# Altium PCB GY-G11.PCBDOC (part 7 of 7)
Units mm, origin at the board's own origin, x right, y up, seen from the top; angles counter-clockwise.
Board outline 170.4 x 114.15 mm, 2 copper layers (Top Layer, Bottom Layer); 364 components, 260 nets, 1285 pads, 753 vias.
Unrouted connection lines stored in the file: 2.
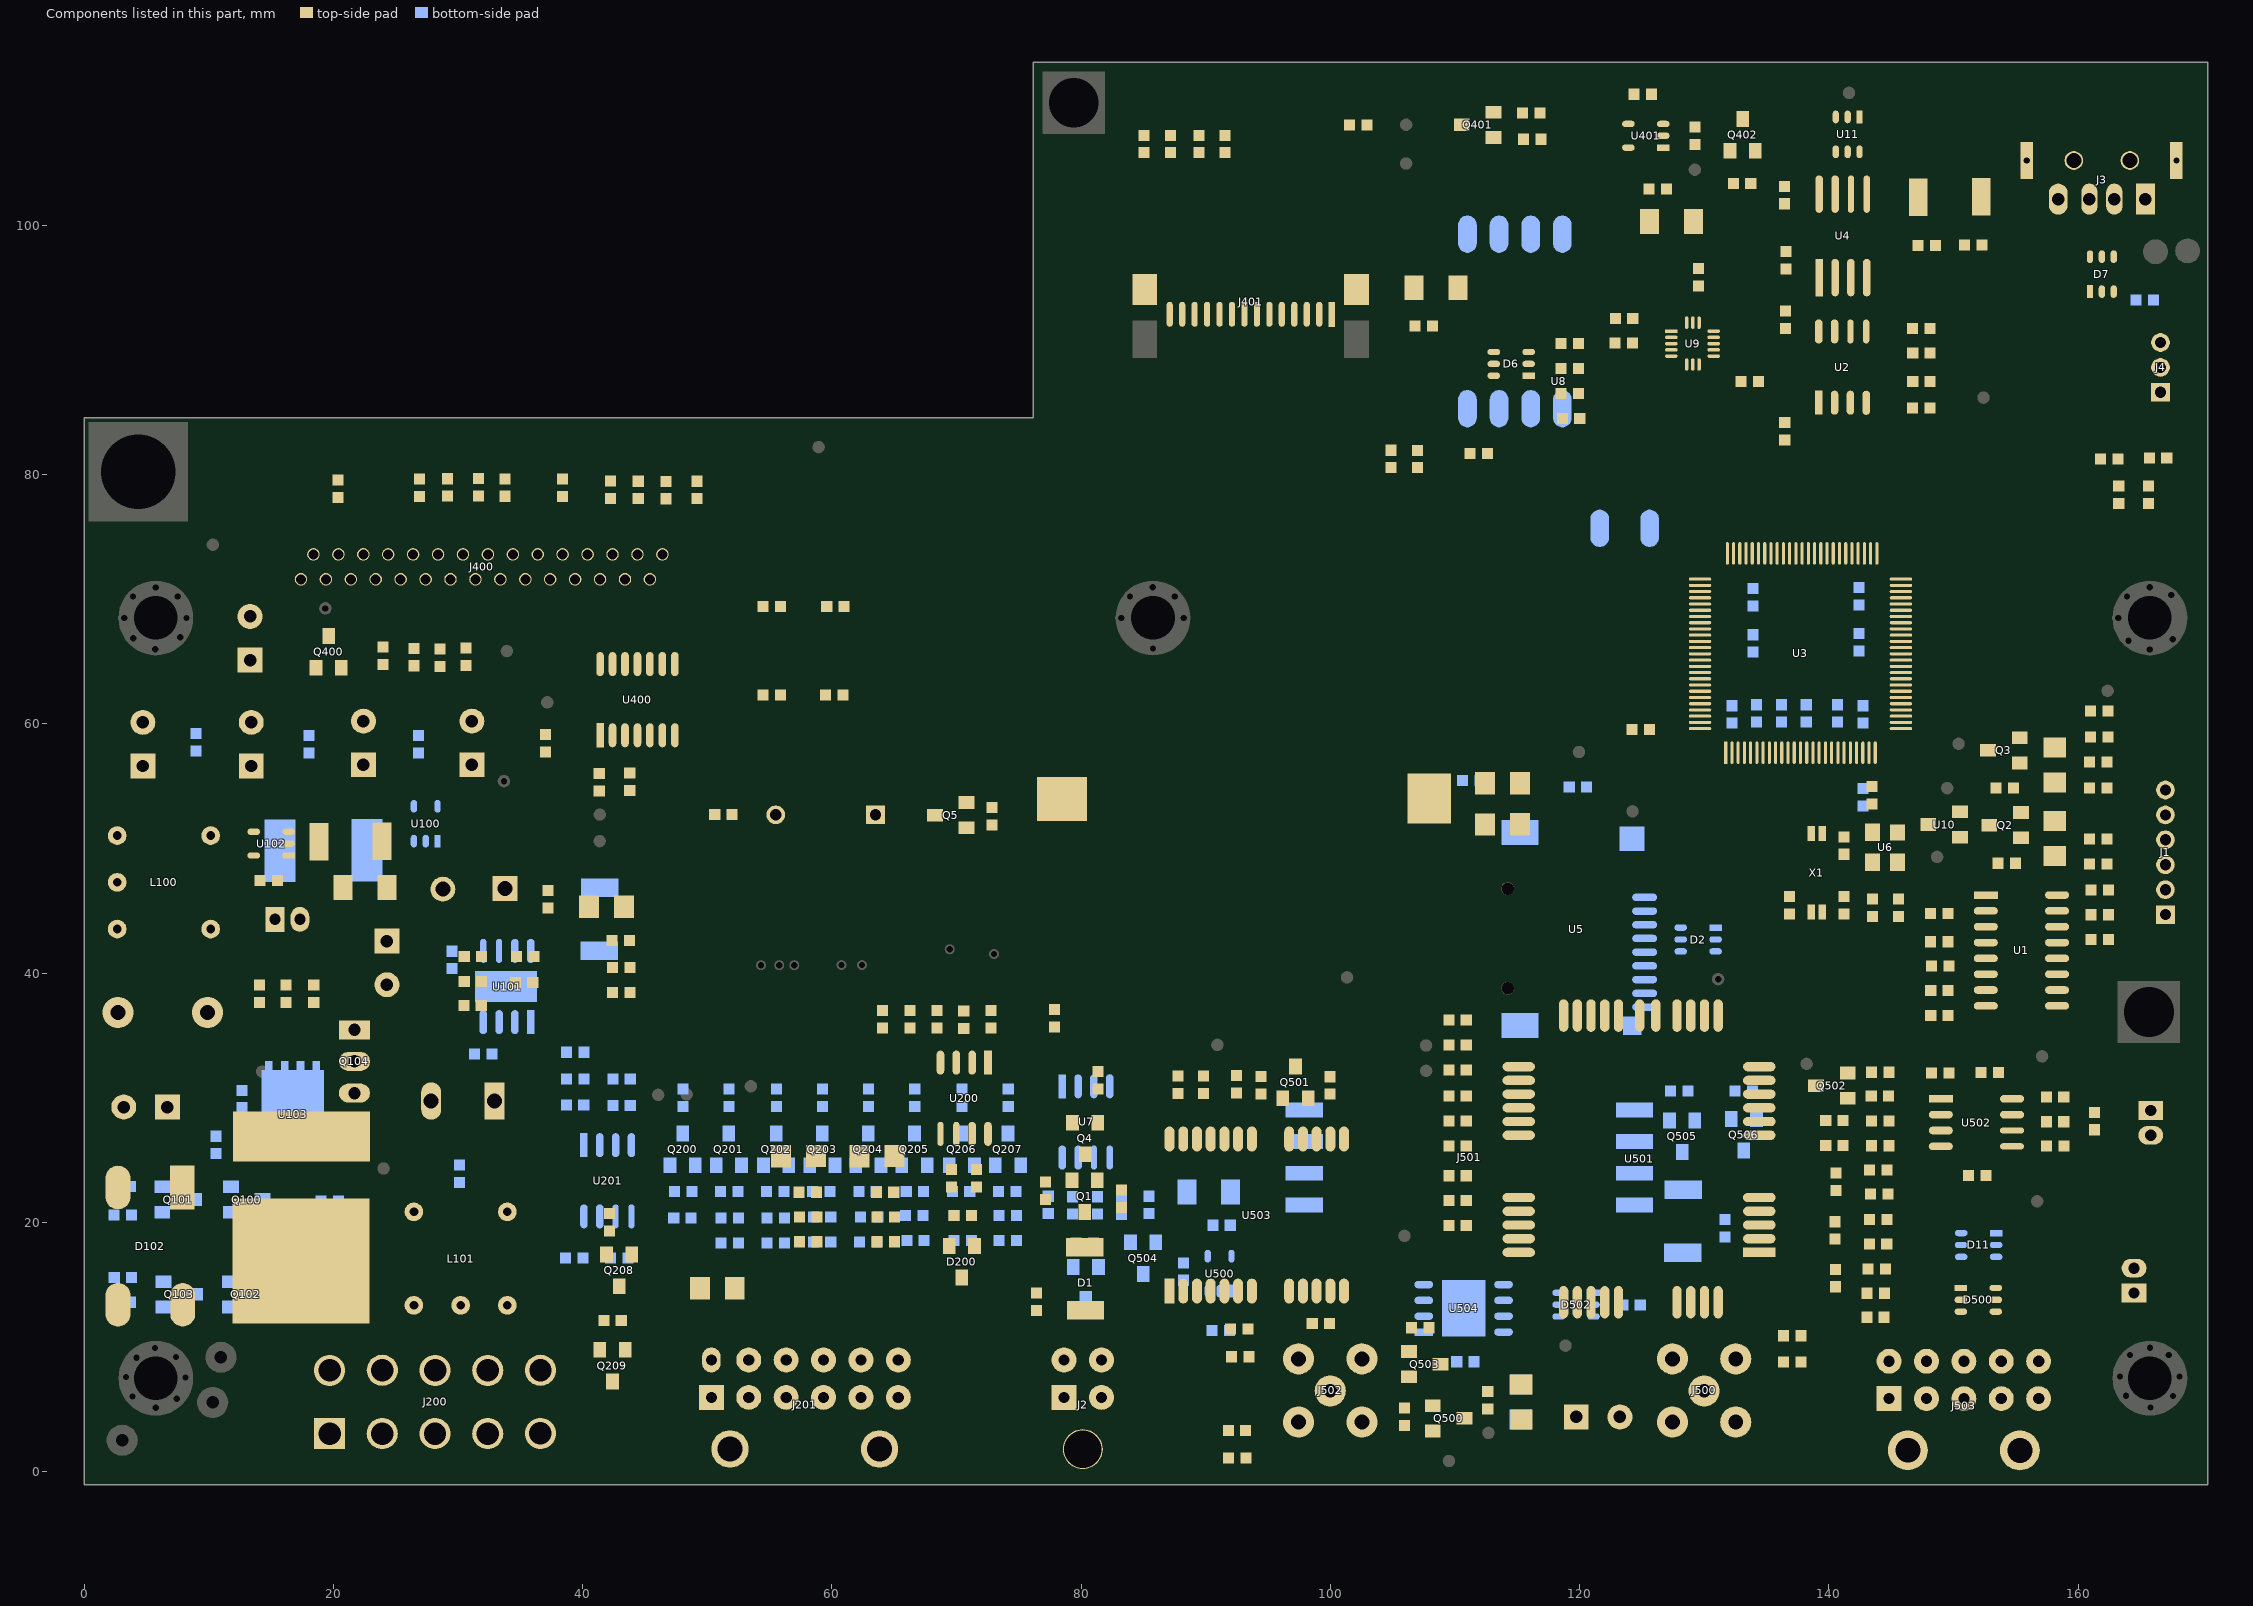
[diagram p7: the components of this part, seen from the top]

## Other copper
Top Layer:
  rectangle net AGND: 41.25,2.81 44.78,4.42
  rectangle net AGND: 40.79,1.25 42.69,2.1
  rectangle net 3V_BL: 103.111,107.68 106.2,108.49
  rectangle net 3V3: 29.81,54.88 34.35,57.9
  rectangle net GND: 128.12,89.56 130.04,91.46
  rectangle net 3V3LCM: 123.08,104.61 124.73,106.48
  rectangle net GND: 61.399,48.9 98.39,50.11
  rectangle net GND: 78.429,110.86 111.209,111.73
  rectangle net VINC: 35.15,33.88 38.069,35.05
  rectangle net 5VB: 75.8,37.65 76.32,38.87
  rectangle net 5VB: 76.16,26.01 76.8,26.3
  rectangle net 5VB: 3.18,55.41 15.12,58.16
  rectangle net 3V3: 127.89,56.728 130.62,59.11
  rectangle net 4V: 126.2,104.7 129.7,106.24
  rectangle net GND: 132.07,60.03 143.16,71.05
  rectangle net 4V: 104.62,0.3 109.38,4.11
  rectangle net VCCGSM: 110.16,2.61 119.94,5.17
  rectangle net VCCGSM: 118.34,2.59 121.31,11.43
  rectangle net 5VA: 13.66,38.97 18.89,40.7
  rectangle net 4V: 23.57,48.38 27.31,50.2
  rectangle net NetJ502_2: 92.94,0.64 103.84,3.8
  rectangle net 5VA: 24.9,44.03 26.46,46.51
  rectangle net 5VA: 24.1,43.18 25.19,46.19
  rectangle net 5VB: 65.34,38.3 67.88,42.46
  rectangle net 5VB: 62.54,80.32 68.79,83.51
  rectangle net 5VB: 66.05,37.36 66.48,38.37
  rectangle net 5VB: 9.37,50.25 13.99,52.05
  rectangle net GND: 1.28,49.94 5.85,54.21
  rectangle net 5VA: 27.43,46.84 29.77,47.87
  rectangle net GND: 77.229,83.039 79.3,111.9
  rectangle net VINC: 37.849,21.38 40.219,35.11
  rectangle net 5VP: 18.669,67.54 20.079,72.29
  rectangle net VINC: 18.039,31.77 38.029,34.13
  rectangle net NetC120_1: 1.209,33.74 4.539,37.73
  rectangle net 3V3-RTC: 115.194,52.71 116.009,52.97
  rectangle net 3V_BL: 106.2,107.68 108.13,108.47
  rectangle net 5VB: 40.14,57.178 40.8,58.368
  rectangle net 5VB: 40.8,56.738 41.63,58.368
  rectangle net GND: 95.67,109.578 96.37,111.288
  rectangle net 4V: 47.76,0.2 58.19,3.5
  rectangle net OUTCTRL: 41.97,4.83 44.62,7.87
  rectangle net AGND: 40.19,10.02 41.375,11.6
  rectangle net GND: 148.49,96.51 151.04,98.76
  rectangle net DST6: 124.809,61.43 125.399,62.07
  rectangle net 3V3-RTC: 114.9,52.56 115.65,54.86
  rectangle net GND: 98.17,59.22 123.22,61.3
  rectangle net NetC502_1: 97.67,11.492 98.04,12.86
Bottom Layer:
  rectangle net OUTCTRL: 41.98,4.86 44.68,7.88
  rectangle net AGND: 46.35,3.6 70.02,4.61
  rectangle net 5VB: 86.2,81.208 87.7,82.338
  rectangle net GND: 2.43,53.99 3.27,60.13
  rectangle net AGND: 0.839,39.39 5.76,50.65
  rectangle net VINC: 33.08,31.81 35.439,34.46
  rectangle net 3V3: 143.76,58.69 143.99,59.15
  rectangle net 3V3: 29.81,54.84 34.35,57.89
  rectangle net 4V: 94.94,53.04 95.729,53.76
  rectangle net 5VB: 8.24,48.62 11.3,56.626
  rectangle net AGND: 32.94,12.35 34.95,14.19
  rectangle net 3V3: 130.22,57.94 145.59,58.84
  rectangle net 3V3: 128.68,57.05 130.58,59.13
  rectangle net 5VB: 9.19,48.62 16.36,52.69
  rectangle net 4V: 49.69,0.14 75.46,3.36
  rectangle net 4V: 75.04,0.16 85.83,4.48
  rectangle net 4V: 85.6,0.19 109.41,2.47
  rectangle net AGND: 36.23,37.71 42.63,40.16
  rectangle net AGND: 12.09,37.54 31.54,40.18
  rectangle net 4V: 23.77,48.7 25.88,50.55
  rectangle net 4V: 26.55,48.72 28.21,49.6
  rectangle net GND: 24.5,51.35 29.24,52.5
  rectangle net GND: 24.52,52.29 25.26,59.35
  rectangle net 5VB: 65.3,38.29 67.91,42.51
  rectangle net 5VB: 62.51,80.28 68.77,83.54
  rectangle net 4V: 91.86,13.78 93.85,15.19
  rectangle net AGND: 46.4,4.38 54.579,6.94
  rectangle net AGND: 61.35,4.19 63.32,7.1
  rectangle net GND: 134.92,61.37 141.36,70.44
  rectangle net NetC100_2: 33.13,45.35 35.84,48.15
  rectangle net VINC: 35.439,31.81 37.509,37.01
  rectangle net VIN1: 31.839,19.85 34.869,31.25
  rectangle net VIN1: 15.819,24.84 32.899,27.31
  rectangle net GND: 1.159,49.99 5.809,54.19
  rectangle net VINC: 14.249,31.72 25.429,34.13
  rectangle net VIN1: 20.329,27.16 23.079,31.22
  rectangle net NetC100_2: 37.059,46.19 40.519,47.61
  rectangle net AGND: 39.829,39.894 42.406,41.33
  rectangle net GND: 17.089,45.02 17.829,45.863
  rectangle net AGND: 40.78,1.2 48.93,4.24
  rectangle net 5VB: 108.99,38.79 113.03,40.76
  rectangle net 3V3: 143.76,58.69 144.56,72.49
  rectangle net SIMCLK: 120.69,15.56 121.87,16.14
  rectangle net SCLI: 116.56,86.09 117.1,86.52

## Silkscreen, mask and mechanical layers (free items; w line width, h text height)
Top Overlay:
  circle w0.2: c41.37,52.73 r0.6
  circle w0.2: c41.364,50.596 r0.6
  circle w0.2: c11,8.91 r0.6
  circle w0.2: c14.283,32.11 r0.6
  circle w0.2: c46.06,30.24 r0.6
  circle w0.2: c48.34,30.28 r0.6
  circle w0.2: c101.33,39.67 r0.6
  circle w0.2: c112.68,3.12 r0.6
  circle w0.2: c157.1,33.33 r0.6
  circle w0.2: c119.94,57.75 r0.6
  circle w0.2: c106.07,104.97 r0.6
  circle w0.2: c106.07,108.08 r0.6
  circle w0.2: c129.24,104.47 r0.6
  circle w0.2: c141.61,110.64 r0.6
  circle w0.2: c148.679,49.33 r0.6
  circle w0.2: c149.49,54.854 r0.6
  circle w0.2: c150.4,58.41 r0.6
  circle w0.2: c37.158,61.732 r0.6
  circle w0.2: c58.93,82.21 r0.6
  circle w0.2: c124.24,52.99 r0.6
  circle w0.2: c109.51,0.86 r0.6
  circle w0.2: c19.35,69.27 r0.6
  circle w0.2: c33.91,65.85 r0.6
  circle w0.2: c90.93,34.25 r0.6
  circle w0.2: c107.67,34.2 r0.6
  circle w0.2: c107.68,32.17 r0.6
  circle w0.2: c118.86,10.11 r0.6
  circle w0.2: c152.4,86.18 r0.6
  rectangle: 168.26,43.972 168.72,45.722
  rectangle: 168.27,54.002 168.78,55.522
  rectangle: 112.26,101.13 121.38,101.59
  rectangle: 116.59,100.72 117.05,102.04
  rectangle: 167.8,87.21 168.31,89.58
  lines w0.1: 74.25,0.11 74.24,0.1 74.34,0 ; 150,112.5 150,104 170,104
  lines w0.2: 163.81,43.432 165.725,43.432 ; 163.82,43.456 163.82,56.172 ; 163.921,56.13 165.73,56.13 ; 165.314,91.837 163.04,91.837 cw(c163.04,91.95) 162.96,91.87 162.96,85.631 ccw(c163.301,85.631) 163.06,85.39 ccw(c163.188,85.518) 163.188,85.337 165.334,85.337 ; 157.759,64.65 ccw(c160.825,64.65) 158.657,62.482 158.851,62.288 cw(c156.683,60.12) 159.749,60.12 159.749,41.572 ccw(c160.261,41.572) 159.899,41.21 163.521,41.21 ccw(c163.521,41.278) 163.569,41.23 163.569,61.3 ccw(c160.503,61.3) 162.671,63.468 162.007,64.132 cw(c164.175,66.3) 161.109,66.3 161.109,79.41 ccw(c160.699,79.41) 160.989,79.7 ccw(c160.627,79.338) 160.627,79.85 157.999,79.85 ccw(c158.578,79.271) 157.759,79.271 157.759,64.65
  lines w0.5: 29.029,36.71 ccw(c30.14,37.821) 30.14,36.25 37.867,36.25 cw(c37.867,35.158) 38.639,35.93 ccw(c37.335,37.234) 39.179,37.234 39.179,41.916 ccw(c38.325,41.916) 38.929,42.52 29.059,42.52 29.059,36.782 cw(c28.956,36.782) 29.029,36.71 ; 51.529,36.512 ccw(c52.041,36.512) 51.679,36.15 60.527,36.15 ccw(c60.527,36.491) 60.769,36.25 60.769,42.619 cw(c61.11,42.619) 60.869,42.86 cw(c60.748,42.981) 60.748,42.81 52.108,42.81 ccw(c52.108,41.991) 51.529,42.57 51.529,36.512
  text "1" at 127.51,105.49 h1 r90
  text "1" at 159.88,94.14 h1
  text "R" at 160.71,87.86 h1.52
  text "1" at 115.78,87.41 h1 r270
  text "T" at 160.71,85.58 h1.52
  text "兰" at 73.19,70.46 h60
  text "+" at 57.24,67.39 h1.1
  text "+" at 57.19,63.18 h1.1
  text "1" at 16.79,48.39 h1 r90
  text "+" at 108.32,47.85 h2
  text "A1" at 56.809,37 h1.52
  text "A1" at 34.209,36.73 h1.52
  text "SPK" at 163.69,23.39 h1.1
  text "MIC" at 163.57,18.94 h1.1
Bottom Overlay:
  lines w0.254: 45.78,51.686 45.78,42.59 75.56,42.59 75.56,51.74 ; 45.79,51.71 75.488,51.71 ; 45.85,32.06 45.85,16.95 75.705,16.95 75.99,16.95 76.119,17.079 ; 45.898,32.04 76.14,32.04 76.14,17.13 ; 114.8,69.3 114.8,90.02 ; 114.8,89.54 114.8,110.068
  lines w1: 88.15,30.1 92.193,34.143 ; 88.17,30.148 88.17,34.19 ; 88.242,34.16 92.2,34.16
  text "3V3" at 150.7,92.61 h1.1
  text "IW" at 153.33,86.41 h1.1
  text "5VB" at 86.55,83.38 h1.1
  text "B" at 45.36,78.5 h1.1
  text "NA" at 39.17,78.48 h1.1
  text "A" at 37.14,75.52 h1.1
  text "NB" at 45.42,75.45 h1.1
  text "Key" at 161.349,73.33 h1.1
  text "T" at 96.02,66.66 h1.1
  text "GPS-U3" at 95.54,64.32 h1.1
  text "3V3" at 128.47,64.05 h1.1
  text "R" at 93.07,61.9 h1.1
  text "3V3" at 147.34,59.37 h1.1
  text "5VB" at 67.68,58.7 h1.1
  text "4V" at 21.65,53.78 h1.1
  text "3V3" at 35.4,53.26 h1.1
  text "5VB" at 9.08,53.24 h1.1
  text "Vrtc" at 138.25,50.9 h1.1
  text "1" at 29.39,49.96 h1
  text "5VA" at 8.77,44.8 h1.1
  text "U1-GSM" at 104.66,42.69 h1.1
  text "3V3" at 91.46,40.32 h1.1
  text "AGND" at 8,39.16 h1.1
  text "S0" at 37.81,20.17 h1.1
  text "5" at 65.7,14.65 h1.1
  text "1" at 93.03,13.86 h1
  text "S7" at 71.91,13.73 h1.1
  text "S4" at 62.16,13.71 h1.1
  text "A1" at 56.45,13.7 h1.1
  text "S3" at 59.26,13.69 h1.1
  text "S2" at 53.78,13.64 h1.1
  text "S1" at 49.74,13.56 h1.1
  text "S6" at 68.281,13.479 h1.1
  text "A2" at 65.07,11.37 h1.1
  text "1" at 107.95,9.85 h1.1 r90
  text "4V" at 109.56,3.82 h1.1
Bottom Paste:
  rectangle: 36.239,37.72 42.629,40.18
  rectangle: 12.109,37.55 31.409,40.19
Drill Guide:
  lines w0.15: 168.01,100.068 168.01,112.498 170,112.498 170,100.068 168.01,100.068
Mechanical 1:
  lines w0.1: 168,112.5 168,100.068 170,100.068 170,112.5 ; 0,-1.05 170.4,-1.05 170.4,112.88 170.4,113.1 76.15,113.1 76.15,84.55 0,84.55 0,0 0,-1.05

## Text inside footprints (layer, text, board x,y; h text height)
C117: Top Overlay "+" at 23.361,47.941 h1 r180
C413: Top Overlay "+" at 107.644,93.941 h1
C417: Top Overlay "+" at 126.544,99.271 h1
C507: Bottom Overlay "+" at 91.056,21.371 h1
D102: Top Overlay "+" at 6.998,23.905 h0.8 r180; Top Overlay "-" at 4.628,23.875 h0.8 r180; Top Overlay "~" at 5.948,14.715 h0.8 r180
U3: Top Overlay "1" at 131.206,58.262 h0.8 r180
U6: Top Overlay "2" at 145.953,52.373 h0.8 r90; Top Overlay "1" at 145.963,47.453 h0.8 r90